# EAGLE board LSU 4.9 OpenAFR MainBoard (EAGLE 9.6.2)
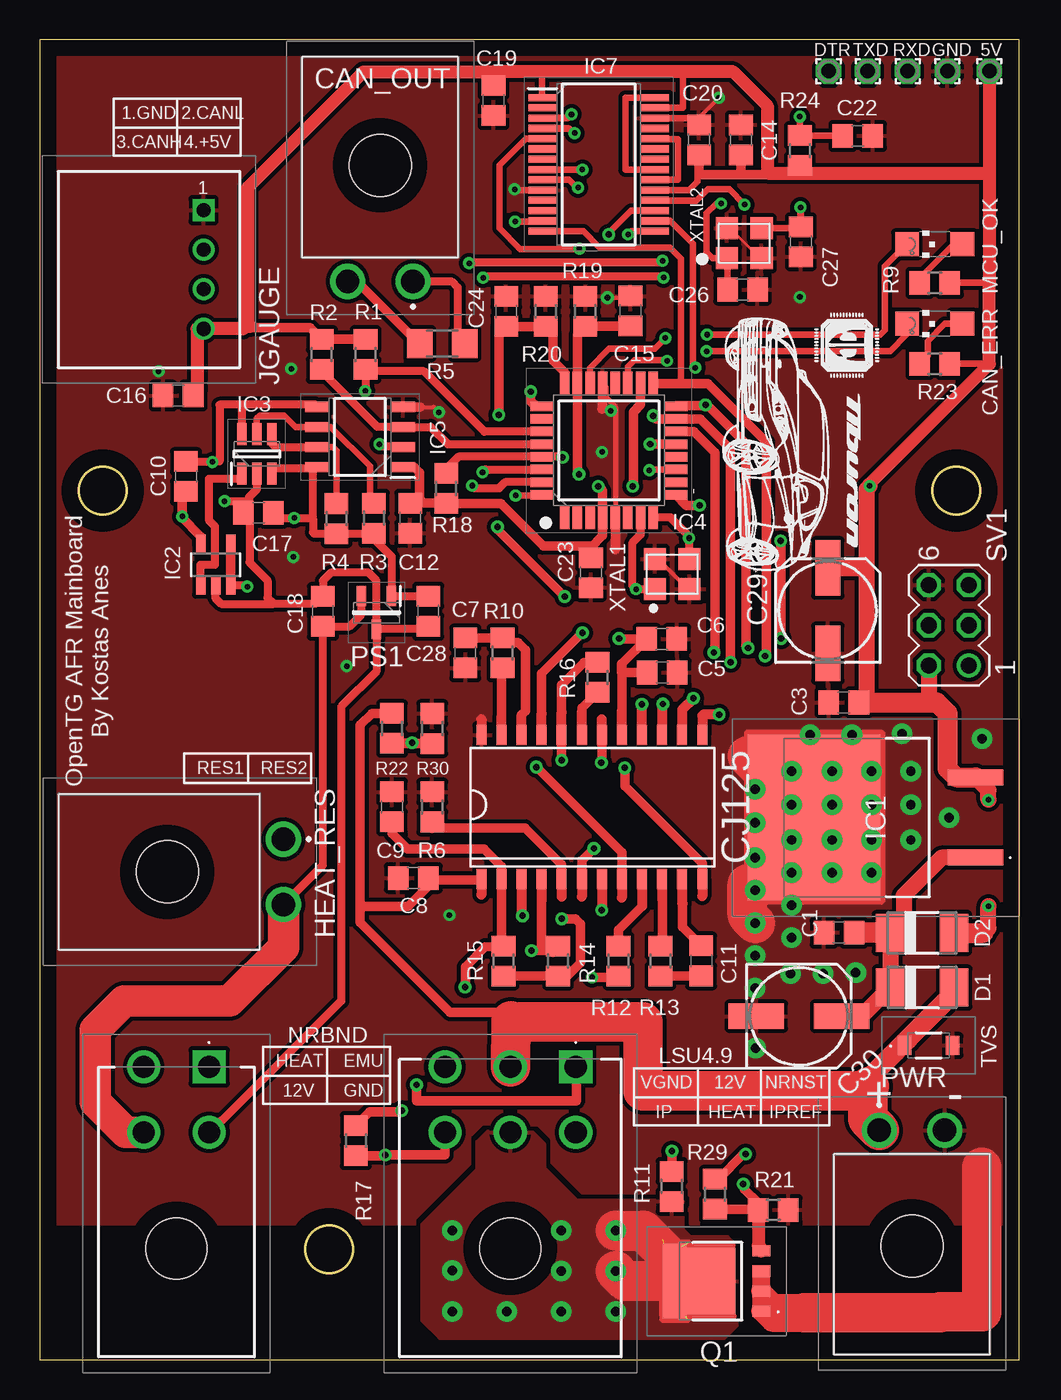
[diagram p0: board, top side]
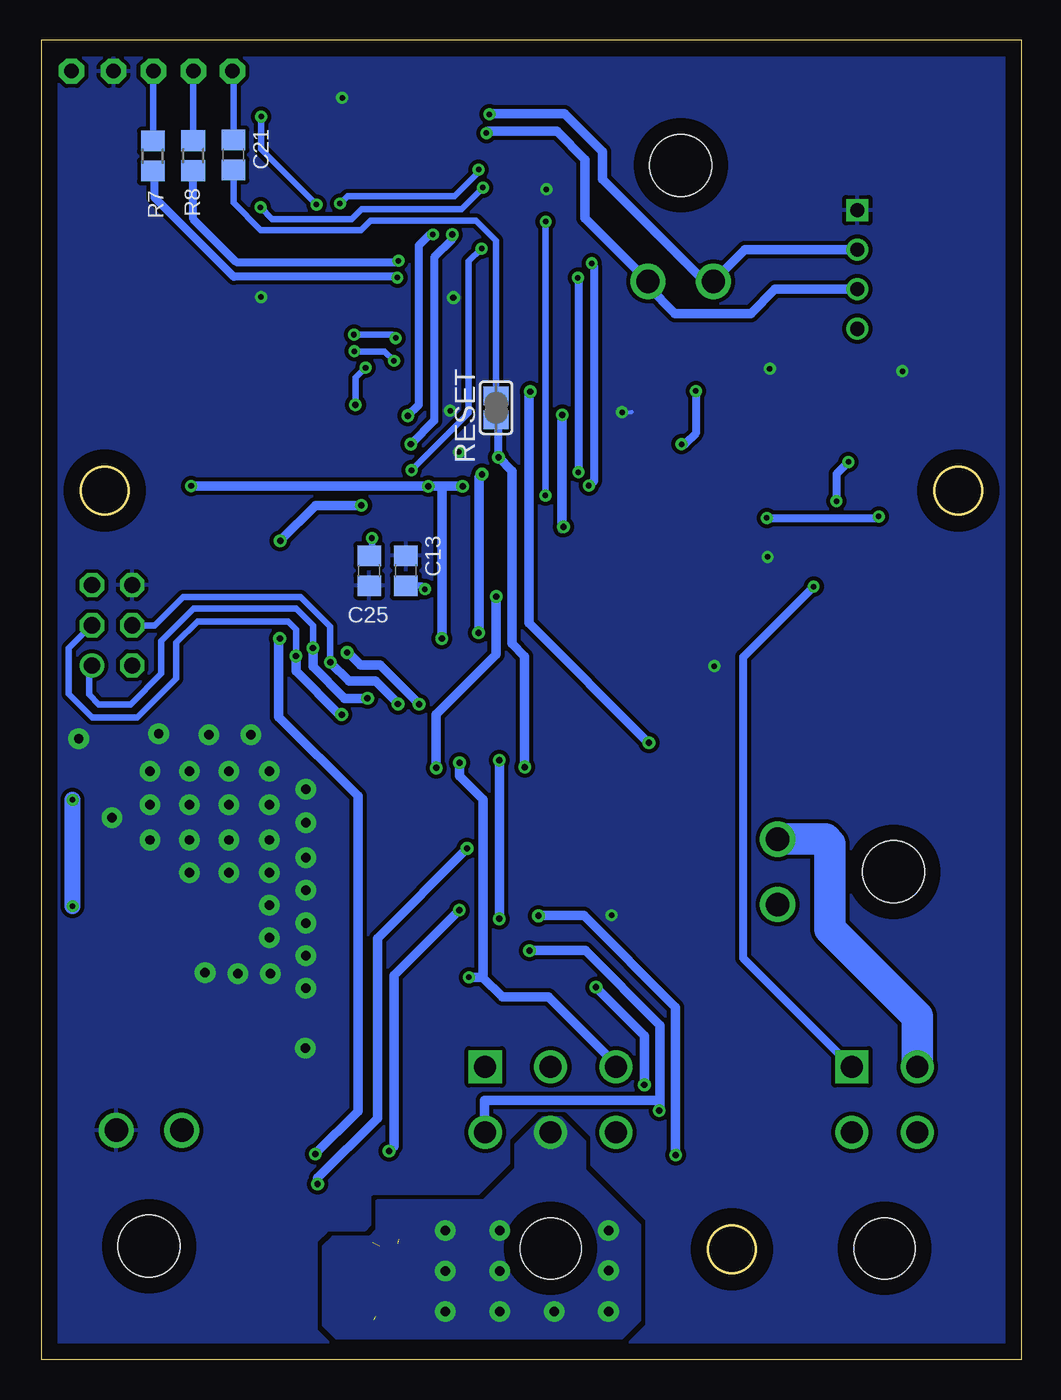
[diagram p1: board, bottom side, seen from below]

Size 62 x 83.54 mm. Coordinates in mm from the lower left corner, seen from the top.
Outline: 0,0 62,0 62,83.54 0,83.54 0,0
Outline: circle at 4,55 radius 1.5
Outline: circle at 58,55 radius 1.5
Outline: circle at 18.33,7 radius 1.5
Copper layers (1*16): Top 0.035mm / dielectric 1.5mm / Bottom 0.035mm
Design rules "default *": minimum track width 6mil, minimum drill 0.35mm, track to track 7mil, track to pad 6mil, pad to pad 6mil, via to via 6mil, smd to smd 6mil, copper to edge 40mil, drill to drill 6mil, minimum pad ring 1mil, minimum via ring 8mil, stop-mask expansion 4mil, vias tented up to drill 0mil, thermal gap 10mil

## Footprints (pad centres in the part's own frame; a part is rotated, then mirrored left to right if it is on the bottom)
1,6/0,9 = drill 0.914 pad 1.6 octagon: 1 0,0
C0805 = smd 1.3 x 1.5: 1 -0.95,0; 2 0.95,0
153CLV-0605 = smd 3.5 x 1.6: + 2.7,0; - -2.7,0
CHIPLED_1206 = smd 1.5 x 1.5: A 0,-1.75; C 0,1.75
17709660 = drill 1.48 pad 2.22: 1 0,0; 2 4.14,0 | hole 3.91: 2.07,-7.34
DO-214AC = smd 1.8 x 2.4: A 2.025,0; C -2.025,0
MC7805CD2TR4G = smd 1.016 x 3.504: 1 -2.54,-6.059; 3 2.54,-6.059 | smd 10.49 x 8.38: 2 0,4.154
SOT23-5 = smd 0.6 x 1.2: 1 -0.95,-1.306; 2 0,-1.306; 3 0.95,-1.306; 4 0.95,1.306; 5 -0.95,1.306
SOT95P270X145-6N = smd 1.4 x 0.6: 1 -1.25,0.95; 2 -1.25,0; 3 -1.25,-0.95; 4 1.25,-0.95; 5 1.25,0; 6 1.25,0.95
QFP80P900X900X120-32N = smd 1.475 x 0.6: 1 -4.238,2.8; 2 -4.238,2; 3 -4.238,1.2; 4 -4.238,0.4; 5 -4.238,-0.4; 6 -4.238,-1.2; 7 -4.238,-2; 8 -4.238,-2.8; 17 4.238,-2.8; 18 4.238,-2; 19 4.238,-1.2; 20 4.238,-0.4; 21 4.238,0.4; 22 4.238,1.2; 23 4.238,2; 24 4.238,2.8 | smd 0.6 x 1.475: 9 -2.8,-4.238; 10 -2,-4.238; 11 -1.2,-4.238; 12 -0.4,-4.238; 13 0.4,-4.238; 14 1.2,-4.238; 15 2,-4.238; 16 2.8,-4.238; 25 2.8,4.238; 26 2,4.238; 27 1.2,4.238; 28 0.4,4.238; 29 -0.4,4.238; 30 -1.2,4.238; 31 -2,4.238; 32 -2.8,4.238
SOIC127P600X175-8N = smd 1.528 x 0.65: 1 -2.711,1.905; 2 -2.711,0.635; 3 -2.711,-0.635; 4 -2.711,-1.905; 5 2.711,-1.905; 6 2.711,-0.635; 7 2.711,0.635; 8 2.711,1.905
SOP65P780X200-28N = smd 1.8 x 0.45: 1 -3.55,4.225; 2 -3.55,3.575; 3 -3.55,2.925; 4 -3.55,2.275; 5 -3.55,1.625; 6 -3.55,0.975; 7 -3.55,0.325; 8 -3.55,-0.325; 9 -3.55,-0.975; 10 -3.55,-1.625; 11 -3.55,-2.275; 12 -3.55,-2.925; 13 -3.55,-3.575; 14 -3.55,-4.225; 15 3.55,-4.225; 16 3.55,-3.575; 17 3.55,-2.925; 18 3.55,-2.275; 19 3.55,-1.625; 20 3.55,-0.975; 21 3.55,-0.325; 22 3.55,0.325; 23 3.55,0.975; 24 3.55,1.625; 25 3.55,2.275; 26 3.55,2.925; 27 3.55,3.575; 28 3.55,4.225
S4BXHALFSN = drill 0.9 pad 1.4 square: 1 0,0 | drill 0.9 pad 1.4: 2 -2.5,0; 3 -5,0; 4 -7.5,0
17709690 = drill 1.4 pad 2.1 square: 1 0,0 | drill 1.4 pad 2.1: 2 -4.14,0; 3 -8.28,0; 4 0,-4.14; 5 -4.14,-4.14; 6 -8.28,-4.14 | hole 3.86: -4.14,-11.48
17709680 = drill 1.4 pad 2.1 square: 1 0,0 | drill 1.4 pad 2.1: 2 -4.14,0; 3 0,-4.14; 4 -4.14,-4.14 | hole 3.86: -2.07,-11.48
SOT95P237X112-3N = smd 1.25 x 0.6: 1 -1.05,0.95; 2 -1.05,-0.95; 3 1.05,0
BUK7Y6R060EX = smd 0.7 x 1.15: 1 -1.905,-2.737; 2 -0.635,-2.737; 3 0.635,-2.737; 4 1.905,-2.737 | smd 4.7 x 1.5: 5 0,2.737 | smd 4.2 x 3.1: 6 0,0.438
R0805 = smd 1.3 x 1.5: 1 -0.95,0; 2 0.95,0
R1206 = smd 1.6 x 1.803: 1 -1.422,0; 2 1.422,0
SJ = smd 1.168 x 1.6: 1 -0.762,0; 2 0.762,0
MA03-2 = drill 1.016: 1 -2.54,-1.27 | drill 1.016 octagon: 2 -2.54,1.27; 3 0,-1.27; 4 0,1.27; 5 2.54,-1.27; 6 2.54,1.27
SMF26VTFTR = smd 1.2 x 0.85: 1 0,1.525; 2 0,-1.525
CJ125-SOIC24 = smd 1.27 x 0.635: P$1 -4.7,7.15; P$2 -4.7,5.88; P$3 -4.7,4.61; P$4 -4.7,3.34; P$5 -4.7,2.07; P$6 -4.7,0.8; P$7 -4.7,-0.47; P$8 -4.7,-1.74; P$9 -4.7,-3.01; P$10 -4.7,-4.28; P$11 -4.7,-5.55; P$12 -4.7,-6.82; P$13 4.4,-6.82; P$14 4.4,-5.55; P$15 4.4,-4.28; P$16 4.4,-3.01; P$17 4.4,-1.74; P$18 4.4,-0.47; P$19 4.4,0.8; P$20 4.4,2.07; P$21 4.4,3.34; P$22 4.4,4.61; P$23 4.4,5.88; P$24 4.4,7.15
E3X160181X04 = smd 1.4 x 1.4: GND1 -1.1,0.9; GND2 1.1,-1; XTAL1 -1.1,-1; XTAL2 1.1,0.9

## Placement (x,y rotation side)
5V1  [1,6/0,9]  60.1,81.54 0 top
C1  100nF  [C0805]  50.58,27.04 180 top
C3  100nF  [C0805]  50.89,41.6 180 top
C5  100nF  [C0805]  39.4,43.49 0 top
C6  100nF  [C0805]  39.37,45.62 0 top
C7  100nF  [C0805]  26.94,44.73 270 top
C8  100nF  [C0805]  23.65,30.49 0 top
C9  2.2nF  [C0805]  22.3,35 90 top
C10  100nF  [C0805]  9.27,55.9 90 top
C11  1nF  [C0805]  41.87,25.25 90 top
C12  100nF  [C0805]  23.46,53.26 90 top
C13  22pF  [C0805]  38.95,49.93 90 bottom
C14  100nF  [C0805]  44.38,77.19 270 top
C15  100nF  [C0805]  37.39,66.37 90 top
C16  100nF  [C0805]  8.77,61.02 0 top
C17  100nF  [C0805]  13.86,53.6 0 top
C18  100nF  [C0805]  17.93,47.36 270 top
C19  100nF  [C0805]  28.73,79.68 90 top
C20  100nF  [C0805]  41.73,77.19 90 top
C21  100nF  [C0805]  49.86,76.24 90 bottom
C22  100nF  [C0805]  51.77,77.44 180 top
C23  100nF  [C0805]  34.89,49.81 270 top
C24  100nF  [C0805]  29.53,66.34 90 top
C25  22pF  [C0805]  41.27,49.94 270 bottom
C26  22pF  [C0805]  44.48,67.71 0 top
C27  22pF  [C0805]  48.18,70.74 270 top
C28  10uF  [C0805]  24.6,47.37 270 top
C29  [153CLV-0605]  49.88,47.41 90 top
C30  [153CLV-0605]  48.05,21.75 0 top
CAN_ERR  [CHIPLED_1206]  56.64,65.56 90 top
CAN_OUT  1-770966-0  [17709660]  23.63,68.24 180 top
D1  S1G  [DO-214AC]  55.85,23.57 0 top
D2  2A Schottky  [DO-214AC]  55.83,27.02 0 top
DTR  [1,6/0,9]  49.93,81.54 0 top
GND1  [1,6/0,9]  57.45,81.54 0 top
HEAT_RES  1-770966-0  [17709660]  15.43,32.95 270 top
IC1  MC7805CD2TR4G  [MC7805CD2TR4G]  53.17,34.32 90 top
IC2  LMV321M5X  [SOT23-5]  11.15,50.32 0 top
IC3  MCP4725A2T-E_CH  [SOT95P270X145-6N]  13.75,57.32 90 top
IC4  ATMEGA328PB-AN  [QFP80P900X900X120-32N]  36.03,57.54 90 top
IC5  ISO6520DR  [SOIC127P600X175-8N]  20.28,58.39 180 top
IC7  MCP25625-E_SS  [SOP65P780X200-28N]  35.38,75.64 0 top
JGAUGE  S4B-XH-A_LF__SN_  [S4BXHALFSN]  10.38,72.74 90 top
LSU4.9  1-770969-0  [17709690]  33.93,18.54 0 top
MCU_OK  [CHIPLED_1206]  56.64,70.59 90 top
NRBND  1-770968-0  [17709680]  10.73,18.54 0 top
PS1  TLV76050DBZR  [SOT95P237X112-3N]  21.32,47.28 270 top
PWR  1-770966-0  [17709660]  53.13,14.54 0 top
Q1  BUK7Y6R0-60EX  [BUK7Y6R060EX]  42.93,4.99 90 top
R1  10k  [R0805]  20.63,63.61 270 top
R2  10k  [R0805]  17.86,63.61 270 top
R3  10k  [R0805]  21.16,53.25 90 top
R4  10k  [R0805]  18.79,53.23 90 top
R5  120R  [R1206]  25.48,64.3 180 top
R6  10k  [R0805]  24.85,34.99 270 top
R7  150R  [R0805]  54.96,76.17 270 bottom
R8  150R  [R0805]  52.41,76.19 270 bottom
R9  1k  [R0805]  56.64,68.14 0 top
R10  100k  [R0805]  29.3,44.73 270 top
R11  6k8  [R0805]  40,10.98 90 top
R12  301R  [R0805]  36.63,25.24 90 top
R13  31K6  [R0805]  39.29,25.24 90 top
R14  470k  [R0805]  32.81,25.24 90 top
R15  100k  [R0805]  29.36,25.24 270 top
R16  4k7  [R0805]  35.3,43.19 270 top
R17  61R9  [R0805]  20.02,13.88 270 top
R18  10k  [R0805]  25.73,55.14 90 top
R19  100k  [R0805]  34.53,66.34 90 top
R20  100k  [R0805]  32.03,66.34 90 top
R21  10k  [R0805]  46.43,9.49 0 top
R22  100k  [R0805]  22.3,39.96 270 top
R23  1k  [R0805]  56.64,63.02 0 top
R24  10k  [R0805]  48.11,76.51 270 top
R29  300R  [R0805]  42.73,10.49 90 top
R30  10k  [R0805]  24.85,39.95 90 top
RESET  [SJ]  33.24,60.24 270 bottom
RXD  [1,6/0,9]  54.93,81.54 0 top
SV1  [MA03-2]  57.54,46.48 90 top
TVS  SMF26VTFTR  [SMF26VTFTR]  56.25,19.9 90 top
TXD  [1,6/0,9]  52.4,81.54 0 top
U$1  CJ125-SOIC24  [CJ125-SOIC24]  35.11,35.13 90 top
U$4  E3X160181X04  [E3X160181X04]  40.03,49.77 0 top
U$5  E3X160181X04  [E3X160181X04]  44.59,70.7 0 top

## Library data of the parts
5V1 DTR GND1 RXD TXD = wirepad
C1 C3 C5-C30 = rcl; SPICEPREFIX: C
CAN_ERR MCU_OK = led
CAN_OUT HEAT_RES PWR = 1-770966-0; DESCRIPTION: TE Connectivity MATE-N-LOK Series, 4.14mm Pitch 2 Way Right Angle Heavy Duty Power Connector, Solder Termination, 9.5A; HEIGHT: 7.77mm; MANUFACTURER_NAME: TE Connectivity; MANUFACTURER_PART_NUMBER: 1-770966-0; MOUSER_PART_NUMBER: 571-1-770966-0; MOUSER_PRICE-STOCK: https://www.mouser.co.uk/ProductDetail/TE-Connectivity-AMP/1-770966-0?qs=qXO2HHLAcoJiZj6lD7oupQ%3D%3D
D1 D2 = diode
IC1 = MC7805CD2TR4G; DESCRIPTION: Linear Voltage Regulator IC Positive Fixed 1 Output 1A D2PAK-3; HEIGHT: 4.826mm; MANUFACTURER_NAME: onsemi; MANUFACTURER_PART_NUMBER: MC7805CD2TR4G; MOUSER_PART_NUMBER: 863-MC7805CD2TR4G; MOUSER_PRICE-STOCK: https://www.mouser.co.uk/ProductDetail/onsemi/MC7805CD2TR4G?qs=%252B9%2Fcbd0IE0TA2t8QN7DaSw%3D%3D
IC2 = linear
IC3 = MCP4725A2T-E_CH; DESCRIPTION: Microchip MCP4725A2T-E/CH, 12 bit Serial DAC, 3.4Msps, 6-Pin SOT-23; HEIGHT: 1.45mm; MANUFACTURER_NAME: Microchip; MANUFACTURER_PART_NUMBER: MCP4725A2T-E/CH; MOUSER_PART_NUMBER: 579-MCP4725A2T-E/CH; MOUSER_PRICE-STOCK: https://www.mouser.co.uk/ProductDetail/Microchip-Technology/MCP4725A2T-E-CH?qs=hH%252BOa0VZEiABOw9BMlFjfA%3D%3D
IC4 = ATMEGA328PB-AN; DESCRIPTION: MCU 8-bit ATmega AVR RISC 32KB Flash 2.5V/3.3V/5V 32-Pin TQFP Tray; HEIGHT: 1.2mm; MANUFACTURER_NAME: Microchip; MANUFACTURER_PART_NUMBER: ATMEGA328PB-AN; MOUSER_PART_NUMBER: 556-ATMEGA328PB-AN; MOUSER_PRICE-STOCK: https://www.mouser.co.uk/ProductDetail/Microchip-Technology/ATMEGA328PB-AN?qs=jy4bLUHv09gDoS2J01KCIw%3D%3D
IC5 = ISO6520DR; DESCRIPTION: Digital Isolators Functional isolation dual-channel 2/0 digital isolator; HEIGHT: 1.75mm; MANUFACTURER_NAME: Texas Instruments; MANUFACTURER_PART_NUMBER: ISO6520DR; MOUSER_PART_NUMBER: 595-ISO6520DR; MOUSER_PRICE-STOCK: https://www.mouser.co.uk/ProductDetail/Texas-Instruments/ISO6520DR?qs=i8QVZAFTkqS9DQbJZwhOyw%3D%3D
IC7 = MCP25625-E_SS; DESCRIPTION: CAN Controller with Transceiver SSOP28 Microchip MCP25625-E/SS, CAN Controller 1MBps CAN 2.0, 28-Pin SSOP; HEIGHT: 2mm; MANUFACTURER_NAME: Microchip; MANUFACTURER_PART_NUMBER: MCP25625-E/SS; MOUSER_PART_NUMBER: 579-MCP25625-E/SS; MOUSER_PRICE-STOCK: https://www.mouser.co.uk/ProductDetail/Microchip-Technology/MCP25625-E-SS?qs=YlpJWyuQ3PO6FRVW%2Ffac7A%3D%3D
JGAUGE = S4B-XH-A_LF__SN_; DESCRIPTION: XH-2.5mm Header side entry 4 way JST XH Series, Series Number S4B, 2.5mm Pitch 4 Way 1 Row Right Angle PCB Header, Solder Termination, 3A; HEIGHT: 7mm; MANUFACTURER_NAME: JST (JAPAN SOLDERLESS TERMINALS); MANUFACTURER_PART_NUMBER: S4B-XH-A(LF)(SN); MOUSER_PART_NUMBER: N/A; MOUSER_PRICE-STOCK: https://www.mouser.co.uk/ProductDetail/JST-Commercial/S4B-XH-ALFSN?qs=QpmGXVUTftF7eeJ4yg3VYQ%3D%3D
LSU4.9 = 1-770969-0; DESCRIPTION: PCB Mount Header, Right Angle, Wire-to-Board, 6 Position, 4.14 mm [.162 in] Centerline, Fully Shrouded, Tin, Mini-Universal MATE-N-LOK; HEIGHT: 11.99mm; MANUFACTURER_NAME: TE Connectivity; MANUFACTURER_PART_NUMBER: 1-770969-0; MOUSER_PART_NUMBER: 571-1-770969-0; MOUSER_PRICE-STOCK: https://www.mouser.co.uk/ProductDetail/TE-Connectivity-AMP/1-770969-0?qs=qXO2HHLAcoJbD0GMLxxebg%3D%3D
NRBND = 1-770968-0; DESCRIPTION: PCB Mount Header, Right Angle, Wire-to-Board, 4 Position, 4.14 mm [.162 in] Centerline, Fully Shrouded, Tin, Mini-Universal MATE-N-LOK; HEIGHT: 11.86mm; MANUFACTURER_NAME: TE Connectivity; MANUFACTURER_PART_NUMBER: 1-770968-0; MOUSER_PART_NUMBER: 571-1-770968-0; MOUSER_PRICE-STOCK: https://www.mouser.co.uk/ProductDetail/TE-Connectivity-AMP/1-770968-0?qs=qXO2HHLAcoL4Dw11VWHBrA%3D%3D
PS1 = TLV76050DBZR; DESCRIPTION: 100-mA, 30-V wide-VIN, fixed-output linear voltage regulator; HEIGHT: 1.12mm; MANUFACTURER_NAME: Texas Instruments; MANUFACTURER_PART_NUMBER: TLV76050DBZR; MOUSER_PART_NUMBER: 595-TLV76050DBZR; MOUSER_PRICE-STOCK: https://www.mouser.co.uk/ProductDetail/Texas-Instruments/TLV76050DBZR?qs=HXFqYaX1Q2wum5FdXU6CLA%3D%3D
Q1 = BUK7Y6R0-60EX; DESCRIPTION: MOSFET BUK7Y6R0-60E/SOT669/LFPAK; HEIGHT: 1.2mm; MANUFACTURER_NAME: Nexperia; MANUFACTURER_PART_NUMBER: BUK7Y6R0-60EX; MOUSER_PART_NUMBER: 771-BUK7Y6R0-60EX; MOUSER_PRICE-STOCK: https://www.mouser.co.uk/ProductDetail/Nexperia/BUK7Y6R0-60EX?qs=cbprxTG2Yq9UL%2F2WHaKVPw%3D%3D
R1-R24 R29 R30 = rcl; SPICEPREFIX: R
RESET = jumper
SV1 = con-lstb; OC_FARNELL: unknown; OC_NEWARK: unknown
TVS = SMF26VTFTR; DESCRIPTION: Transient Voltage Suppressor (AEC-Q101 Qualified); HEIGHT: 0.9mm; MANUFACTURER_NAME: ROHM Semiconductor; MANUFACTURER_PART_NUMBER: SMF26VTFTR; MOUSER_PART_NUMBER: 755-SMF26VTFTR; MOUSER_PRICE-STOCK: https://www.mouser.co.uk/ProductDetail/ROHM-Semiconductor/SMF26VTFTR?qs=HXFqYaX1Q2zSWViY1YLSPg%3D%3D
U$1 = CJ125-SOIC24
U$4 U$5 = E3X160181X04

## Nets
5V_ISO: C10.1 C17.2 C28.1 IC2.5 IC3.3 IC5.8 PS1.1 R3.1 R4.1
12VNRBND: C18.2 HEAT_RES.2 NRBND.4 PS1.2
+5V: 5V1.1 C3.1 C5.1 C6.1 C12.2 C14.2 C16.2 C19.2 C20.1 C23.1 C29.+ D2.A IC1.3 IC4.4 IC4.18 IC5.1 IC7.1 IC7.19 IC7.27 JGAUGE.4 R1.1 R2.1 R9.2 R18.1 R23.2 R24.2 SV1.2 U$1.P$17
+12V: C8.2 D1.A LSU4.9.2 PWR.1 R22.1 TVS.1 U$1.P$1
CAN_H: CAN_OUT.1 IC7.4 JGAUGE.3 R5.1
CAN_INT: IC4.32 IC7.13
CAN_L: CAN_OUT.2 IC7.3 JGAUGE.2 R5.2
CAN_STBY: IC4.11 IC7.5
DTR: C21.2 DTR.1
ERROR_LED: CAN_ERR.C IC4.19
GND: C1.2 C3.2 C5.2 C6.2 C7.2 C8.1 C9.2 C12.1 C13.2 C14.1 C15.2 C16.1 C19.1 C20.2 C22.1 C23.2 C24.2 C25.2 C26.2 C27.2 C29.- C30.- GND1.1 IC1.2 IC4.5 IC4.21 IC5.4 IC7.10 IC7.26 JGAUGE.1 PWR.2 Q1.1 Q1.2 Q1.3 R6.1 R19.2 R20.2 R21.2 R30.2 SV1.6 TVS.2 U$1.P$24 U$4.GND1 U$4.GND2 U$5.GND1 U$5.GND2
HEAT_GATE: Q1.4 R21.1 R29.1 U$1.P$6
LSU_HEAT: LSU4.9.5 Q1.5 Q1.6 R11.1
LSU_IP: LSU4.9.6 R17.2 U$1.P$3
LSU_IPREF: LSU4.9.4 R14.2 R17.1 U$1.P$4
LSU_VGND: LSU4.9.3 R12.1 U$1.P$18
LSU_VNERNST: C9.1 LSU4.9.1 R15.1 U$1.P$2
N$1: C27.1 IC7.9 U$5.XTAL2
N$2: R10.2 U$1.P$23
N$3: IC2.1 IC3.1
N$4: C21.1 RESET.1
N$5: C26.1 IC7.8 U$5.XTAL1
N$6: C1.1 C30.+ D1.C D2.C IC1.1
N$7: R6.2 U$1.P$5
N$8: IC4.31 R8.2
N$9: IC4.30 R7.2
N$10: MCU_OK.A R9.1
N$11: C7.1 R10.1 U$1.P$22
N$12: CAN_ERR.A R23.1
N$13: C22.2 IC7.18 R24.1
N$14: R12.2 U$1.P$9
N$15: R11.2 U$1.P$7
N$16: R13.2 U$1.P$10
N$17: C11.1 R13.1
N$18: C11.2 U$1.P$11
N$20: R16.2 U$1.P$19
N$23: IC4.25 R22.2 R30.1
N$24: C25.1 IC4.8 U$4.XTAL2
N$25: C13.1 IC4.7 U$4.XTAL1
N$32: IC4.9 R29.2
NRBND_EMU: IC2.3 IC2.4 NRBND.1
NRBND_GND: C10.2 C17.1 C18.1 C28.2 IC2.2 IC3.2 IC3.6 IC5.5 NRBND.3 PS1.3
NRBND_HEAT: HEAT_RES.1 NRBND.2
POWER_ON: IC4.22 MCU_OK.C
RESET: IC4.29 R18.2 RESET.2 U$1.P$8
RXCAN: IC7.21 IC7.28
RXD: R8.1 TXD.1
SCL: IC4.28 IC5.3 R2.2
SCL_ISO: IC3.5 IC5.6 R3.2
SDA: IC4.27 IC5.2 R1.2
SDA_ISO: IC3.4 IC5.7 R4.2
SPI_CLK: IC4.17 IC7.14 SV1.3 U$1.P$13
SPI_CS1: IC4.14 U$1.P$16
SPI_CS2: IC4.13 IC7.17
SPI_MISO: IC4.16 IC7.16 SV1.1 U$1.P$14
SPI_MOSI: IC4.15 IC7.15 SV1.4 U$1.P$15
TXCAN: IC7.20 IC7.24
TXD: R7.1 RXD.1
UA: C15.1 IC4.23 R19.1 U$1.P$21
UR: C24.1 IC4.24 R20.1 U$1.P$12
USUP: R14.1 R15.2 R16.1 U$1.P$20

## Tracks (layer width: path | path; a pad name or v marks a point on that pad's centre or on a via)
5V_ISO  (via drill 0.35)
  Top 0.508: 17.29,56.41 17.31,56.41 17.31,53.22 | 17.29,56.41 14.78,56.41 14.7,56.33 IC3.3 | 17.29,56.41 17.29,56.44 17.29,56.48 | 9.03,54.95 C10.1 | C17.2 15.14,53.27 v16.12,53.27 17.26,53.27 17.31,53.22 | R3.1 21.08,52.22 | R4.1 18.25,52.28 | 17.31,53.22 17.31,52.36 17.39,52.28 R4.1 | R4.1 21.14,52.28 R3.1 | R3.1 21.16,51.93 22.28,50.81 PS1.1 C28.1
  Top 0.6: 17.29,56.48 IC5.8 | 17.4,56.44 17.29,56.44
  Top 0.61: IC2.5 10.2,52.1 8.98,53.32 v9.03,53.37 9.03,54.95
  Bottom 0.406: 9.03,53.26 v9.03,53.37 | v16.12,53.26 v16.12,53.27
  Bottom 0.508: v16.12,53.26 9.03,53.26
12VNRBND
  Top 0.508: PS1.2 20.37,47.17 19.61,46.41 C18.2 17.93,31.31 HEAT_RES.2
  Top 0.6: PS1.2
  Top 2: HEAT_RES.2 15.43,26.1 12.04,22.71 5.36,22.71 3.52,20.87 3.52,16.32 5.44,14.4 NRBND.4
+5V  (via drill 0.35, 0.4 pad 0.6, 0.4 pad 0.75)
  Top 0.2: JGAUGE.4 10.54,65.4 13.34,65.4
  Top 0.406: R2.1 19.21,64.57 19.46,64.57 | C20.1 41.63,76.24 41.63,74.55 41.1,74.02 IC7.19 | 31.86,79.86 IC7.1 31.78,79.92 31.78,81.49 | R9.2 57.62,68.17 60.09,68.17 | R23.2 60.09,63.03 60.12,63.03 | IC7.27 40.7,79.22 40.7,81.45 40.66,81.49 | R24.2 48.11,75.12 48.08,75.09
  Top 0.508: C12.2 23.78,54.21 24.06,54.49 | 56.27,41.66 52.33,41.66
  Top 0.6: 36.85,41.05 36.85,44.05 C6.1 | C5.1 36.82,43.49 36.82,44.03 C6.1 | C6.1 36.69,45.62 v36.67,45.64 | IC5.1 22.96,56.45 | R2.1 17.9,64.6 20.59,64.6 R1.1 | R1.1 | JGAUGE.4 10.36,65.22 | 9.97,61.27 C16.2 | 44.38,74.99 41.73,74.99 C20.1 | C14.2 44.38,74.99 | 60.09,74.99 60.06,74.99 | C23.1 34.86,50.76 34.86,51.38 34.86,51.5 | 29.14,81.04 C19.2 | 46.04,75.09 46.04,74.99 44.38,74.99
  Top 0.61: 34.86,51.5 31.88,51.5 29.19,54.19 R18.1 25.7,54.22 24.34,54.22 24.06,54.49 24.06,56.13 23.71,56.48 IC5.1 | IC4.18 38.03,60.43 37.58,59.97 37.58,55.33 v37.53,55.28 | v35.36,55.28 35.63,55.01 IC4.4 35.63,52.15 34.86,51.38 | 13.34,65.4 13.44,65.3 17.12,65.3 R2.1
  Top 0.63: U$1.P$17 36.85,41.05
  Top 0.813: 10.36,65.22 9.97,65.22 9.97,61.27 | v52.53,55.3 52.53,55.45 60.12,63.03 | 60.09,63.03 60.09,68.17 60.09,74.99 60.09,75.09 | 60.09,75.09 48.08,75.09 46.04,75.09 46.04,79.34 43.89,81.49 40.66,81.49 31.78,81.49 28.67,81.49 | 60.09,75.09 5V1.1 | JGAUGE.4 12.86,65.24 13.18,65.56 13.18,74.17 20.5,81.49 28.67,81.49 | 13.24,65.4 13.34,65.4 | C19.2 28.73,81.43 28.67,81.49
  Top 1: C3.1 52.33,41.6 52.33,41.66 52.33,50.2 52.33,55.09 v52.53,55.3
  Top 1.016: 59.73,27.02 60.04,27.33 v60.04,28.71 | v60.04,35.44 60.04,36.05 IC1.3 | C29.+ 52.23,50.11 52.33,50.2 | SV1.2 56.27,41.66
  Top 1.27: C3.1 56.76,41.6 57.44,40.92 57.44,37.42 58,36.86 IC1.3 | D2.A 59.73,27.02
  Bottom 0.6: 36.67,55.28 v37.53,55.28 | 36.67,55.28 v35.36,55.28 | 36.67,55.28 v36.67,45.64 36.67,47.13 | 52.53,55.28 v52.53,55.3
  Bottom 0.61: v37.53,55.28 52.53,55.28
  Bottom 1.016: v60.04,28.71 v60.04,35.44
+12V
  Top 0.152: 55.04,20.16 54.92,20.28 | 54.51,19.52 54.16,19.52 54.53,19.9 TVS.1 52.51,17.68 52.51,17.3
  Top 0.6: C8.2 24.6,30.39 25,30.39 | U$1.P$1 27.91,30.38 24.99,30.38 | 22.3,40.93 R22.1 | 20.29,40.17 20.29,28.7 | 29.83,21.45 29.83,22 29.49,22
  Top 0.61: 25,30.39 24.99,30.38 23.31,28.7 20.29,28.7 20.29,27.69 25.98,22 29.49,22 | R22.1 21.03,40.91 20.29,40.17
  Top 0.63: U$1.P$1 27.96,29.43
  Top 1.27: D1.A 57.88,23.24 54.92,20.28 54.16,19.52 51.67,17.04
  Top 2.5: LSU4.9.2 29.83,21.39 | 29.83,21.39 29.83,21.45 | 51.67,17.04 38.19,17.04 38.19,21.39 29.83,21.39 | 52.51,17.3 52.41,17.2 52.41,15.26 PWR.1
CAN_H  (via drill 0.35)
  Top 0.45: v33.85,77.62 33.76,77.62 33.47,77.92 IC7.4
  Top 0.508: CAN_OUT.1 26.06,68.24 26.45,67.85 26.45,64.75 R5.1
  Bottom 0.61: v33.85,77.62 33.74,77.72 29.4,77.72 27.63,75.95 27.63,72.24 CAN_OUT.1 23.63,67.93 21.91,66.21 17.12,66.21 15.59,67.74 JGAUGE.3
CAN_INT  (via drill 0.35)
  Top 0.406: 31.76,54.7 IC4.32 31.74,54.69 v30.12,54.69 | v30.1,72.03 31.83,72.03 IC7.13
  Bottom 0.406: v30.12,54.69 v30.11,54.7 v30.11,72.03 v30.1,72.03
CAN_L  (via drill 0.35)
  Top 0.45: v33.66,78.8 33.43,78.57 IC7.3
  Top 0.61: CAN_OUT.2 19.79,68.54 23.63,64.69 24.06,64.69 R5.2
  Bottom 0.61: v33.66,78.8 33.62,78.84 28.9,78.84 26.5,76.44 26.5,74.69 20.05,68.24 CAN_OUT.2 17.49,70.24 JGAUGE.2
CAN_STBY  (via drill 0.35)
  Top 0.406: IC7.5 30.79,77.27 29.1,75.58 29.1,71.59 30.4,70.29 34.13,70.29 v34.16,70.32 | v38.59,56.29 38.63,56.33 IC4.11
  Bottom 0.406: v34.16,70.32 34.97,69.51 34.97,59.91 v38.59,56.29
DTR
  Bottom 0.406: DTR.1 49.86,81.47 C21.2
ERROR_LED  (via drill 0.35)
  Top 0.406: CAN_ERR.C 54.89,64.89 53.82,63.82 v42.21,63.82 | v39.71,63.21 39.67,63.25 37.65,63.25 37.23,62.83 IC4.19
  Bottom 0.406: v39.71,63.21 40.29,63.79 42.18,63.79 v42.21,63.82
GND  (via drill 0.35, 0.35 pad 0.75, 0.4 pad 0.6, 0.6 pad 1.3)
  Top 0.2: U$5.GND1 43.67,71.6 45.57,69.7 45.81,69.7
  Top 0.254: 39.13,50.67 41.03,48.77 | 24.07,60.3 24.93,60.3 v25.27,59.96 | C20.2 41.73,78.6 v42.98,79.85 | IC4.21 35.63,60.57 v36.15,60.05 | v35.94,67.21 37.36,67.21 37.39,67.24
  Top 0.305: 41.03,48.77 U$4.GND2 | 43.66,71.64 43.53,71.64 U$5.GND1 | 45.6,69.7 45.81,69.7 | 39.13,50.67 U$4.GND1 | IC4.21 35.83,61.58 35.83,60.91 36.43,60.31 IC4.5 | IC7.10
  Top 0.406: C19.1 28.87,78.59 | 38.94,78.58 IC7.26 41.3,78.56 41.75,78.12 | 41.73,78.58 C20.2 | U$5.GND2 45.81,69.7 45.85,69.7 | 45.69,67.97 C26.2 | 48.09,69.7 C27.2 | Q1.3 45.28,5.24 45.28,3.47 Q1.1 | Q1.3 46.03,5.26 46.03,5.1 | 46.03,5.1 46.03,4.75 | 45.89,4.96 45.67,4.74 Q1.2 45.67,5.18 | 45.89,4.96 46.03,5.1 | Q1.3 45.67,5.18 | 45.67,5.18 45.89,4.96 | 44.83,29.02 53.26,29.02 53.32,29.08 53.32,39.6 53.26,39.66 44.8,39.66 44.79,39.65 44.79,38.21 44.79,30.11 44.79,29.04 | 44.79,29.04 44.72,28.97 | IC1.2 49.02,33.27 44.79,29.04 | IC7.10 30.11,74.02 v30.06,74.06
  Top 0.6: C7.2 26.98,43.74 | 24.83,35.95 R6.1 | 8.02,61.02 C16.1 7.53,60.73 | R30.2 25.1,40.65 | C5.2 40.45,43.39 | v35.94,67.21 35.94,67.24 | 37.39,67.24 C15.2 | 34.53,67.24 R19.2 | 41.75,78.12 C20.2
  Top 0.61: IC4.21 35.63,60.19 35.59,60.15 | IC4.5 36.43,51.26 | IC5.4 24.07,60.3
  Top 0.63: 27.96,40.55 U$1.P$24
  Top 0.813: R21.2 47.18,9.29 | 40.32,46 C6.2
  Top 1.27: Q1.1 46.33,2.42 51.1,2.42 50.54,2.98 48.39,2.98 47.04,2.98 Q1.2 46.46,3.56 48.65,3.56
  Top 2.5: 48.39,2.98 56.95,2.98 57.01,3.04 59.63,3.04 59.63,12.2 59.61,12.2
  Top 2.54: v45.27,27.65 44.79,28.13 44.79,30.11 | IC1.2 48.68,34.32 44.79,38.21
  Bottom 0.254: v25.27,59.96 24.68,59.96 24.65,59.99
  Bottom 0.813: 57.51,81.48 GND1.1
  other vias: 47.59,28.78 47.59,37.24 47.59,35.12 50.15,35.12 52.64,35.12 52.64,32.9 50.15,32.9 47.59,32.9 47.59,30.84 47.59,26.72 50.15,30.84 52.64,30.84 50.15,37.24 52.64,37.24 55.13,37.24 55.13,35.12 55.13,32.9 47.52,24.43 7.53,62.55 59.65,39.29 51.65,24.51 49.59,24.45 57.54,34.3 45.27,36.11 45.27,33.99 45.27,31.77 45.27,29.71 45.27,25.59 45.27,23.53 45.3,19.73 16.06,50.8 35.59,57.44 19.44,43.9 25.94,28.14 15.93,62.71 48.11,67.25 48.75,39.56 51.4,39.56 54.59,39.61
  pour Top (isolate 0.254, rank 2): 1.04,8.64 62.72,8.64 62.72,82.76 1.04,82.76
  pour Bottom (isolate 0.254, rank 2): 0.99,82.75 0.99,-0.84 63.41,-0.84 63.41,82.75
HEAT_GATE  (via drill 0.4 pad 0.6)
  Top 0.6: v35.08,32.36 34.32,31.6 U$1.P$6 | R29.1 45.43,9.54 R21.1
  Top 0.61: v44.53,11.13 44.61,11.05 44.61,10.8 45.48,9.93 R21.1
  Top 0.63: U$1.P$6 34.31,29.3
  Top 0.813: R21.1 45.48,7.25 45.67,7.07 Q1.4
  Bottom 0.6: v44.53,11.13 44.53,11.51 40.75,15.29
  Bottom 0.61: v35.08,32.36 40.75,26.69 40.75,15.29
LSU_HEAT  (via drill 0.6 pad 1.3)  (3 unrouted)
  Top 0.2: 40.25,5.73 39.4,5.73
  Top 0.406: 39.4,7.62 39.4,5.73 39.4,2.59 39.46,2.53 40.99,2.53 | 39.47,7.37 39.52,7.42 41.07,7.42 | 40.62,7.18 40.68,7.24 43.83,7.24 | 40.87,2.78 43.92,2.78 | Q1.6 41.75,5.73 40.66,5.73 40.25,5.73
  Top 0.6: 40,4.99 Q1.6
  Top 2.54: v36.45,8.18 38.21,8.18 40.66,5.73 | Q1.6 37.08,4.99 v36.45,5.62
  other vias: 26.13,8.18 33.01,8.18 33.01,5.62 26.13,5.66 26.13,3.06 29.57,3.06 33.01,3.06 36.45,3.06
  pour Top: 29.18,15.34 27.65,13.81 27.65,12.06 24.18,8.59 24.18,2.49 25.3,1.37 43.36,1.37 44.15,2.16 44.15,7.21 43.56,7.8 41.23,7.8 40.75,8.28 40.75,10.03 40.69,10.09 34.04,10.09 31.98,12.15 31.98,13.67 30.31,15.34
  pour Bottom (no thermals): 29.15,15.35 27.66,13.86 27.66,13.68 27.65,13.67 27.65,12.06 24.17,8.58 24.17,2.49 25.29,1.37 43.35,1.37 44.15,2.17 44.15,7.22 43.57,7.8 41.22,7.8 40.76,8.26 40.76,10.09 34.03,10.09 31.97,12.15 31.97,13.69 30.31,15.35
LSU_IP  (via drill 0.4 pad 0.6)
  Top 0.6: 30.5,28.1 v30.56,28.1 | 20.02,12.84 R17.2 21.88,12.93 v21.88,12.97 25.65,12.97 LSU4.9.6
  Top 0.63: U$1.P$3 30.5,28.1
  Bottom 0.61: v30.56,28.1 v30.55,28.11 27.67,28.11 21.88,22.32 v21.88,12.97
LSU_IPREF  (via drill 0.4 pad 0.6)
  Top 0.508: R14.2 32.49,25.77
  Top 0.6: v22.92,15.78 22.84,15.7 20.89,15.7 R17.1 | 31.06,25.97 v31.13,25.9 31.77,25.9 | 32.49,25.77 32.49,25.9 31.77,25.9 | 31.77,29.1 31.77,25.9
  Top 0.63: U$1.P$4 31.77,29.1
  Bottom 0.6: LSU4.9.4 33.98,16.42 22.92,16.42 v22.92,15.78
  Bottom 0.61: v31.13,25.9 27.58,25.9 22.86,21.18 22.86,15.84 v22.92,15.78
LSU_VGND  (via drill 0.35, 0.4 pad 0.6)
  Top 0.6: U$1.P$18 35.58,37.81 v35.55,37.78 | v34.96,24.21 36.17,24.21 36.25,24.29 R12.1
  Top 0.63: U$1.P$18 35.58,40.54
  Bottom 0.6: LSU4.9.3
  Bottom 0.61: LSU4.9.3 25.65,18.7 29.92,22.97 32.85,22.97 34.09,24.21 v34.96,24.21 34.07,24.21 34.07,35.46 35.55,36.94 v35.55,37.78
LSU_VNERNST  (via drill 0.4 pad 0.6)
  Top 0.6: LSU4.9.1 33.97,16.41 23.87,16.41 v23.87,17.4 v23.86,17.41 | U$1.P$2 29.23,26.32 R15.1 28.19,26.13 26.94,24.88 26.94,23.6 v26.92,23.58
  Top 0.61: U$1.P$2 29.23,31.23 28.13,32.34 23.27,32.34 22.3,33.31 C9.1
  Bottom 0.6: v26.92,23.58 23.84,20.5 23.84,17.43 v23.86,17.41
N$1  (via drill 0.35)
  Top 0.406: v34.08,74.17 34,74.17 33.5,74.67 IC7.9 | U$5.XTAL2 47.79,71.6 48.15,71.96 v48.15,72.92 48.18,72.89 C27.1
  Bottom 0.406: v48.15,72.92 47.41,72.18 42.38,72.18 41.74,72.81 35.44,72.81 v34.08,74.17
N$2
  Top 0.6: R10.2 29.23,43.71 29.23,40.65
  Top 0.63: U$1.P$23 29.23,40.65
N$3
  Top 0.508: IC2.1 10.18,49.01 10.18,50.32 11.11,50.32 11.11,52.74 10.71,53.14 10.71,55.76 12.81,55.76 IC3.1
N$4
  Bottom 0.406: RESET.1 33.24,70.8 34.51,72.07 41.18,72.07 41.77,71.48 48.13,71.48 49.86,73.21 C21.1
N$5  (via drill 0.35)
  Top 0.406: v34.35,75.31 v34.34,75.31 IC7.8 | v43.12,73.17 42.82,73.17 42.21,72.56 42.21,70.08 42.59,69.7 U$5.XTAL1 43.53,69.66 C26.1
  Bottom 0.406: v43.12,73.17 42.65,73.64 35.86,73.64 34.35,75.15 v34.35,75.31
N$6
  Top 1: D2.C 53.83,27 D1.C
  Top 1.016: IC1.1 57.08,31.78 54.68,29.38 54.68,27.86 53.83,27 | C30.+ 52.01,21.75 D1.C
  Top 1.27: D1.C 53.83,23.18
  Top 1.3: D2.C 53.8,27.04 C1.1
N$7
  Top 0.6: 24.84,33.64 R6.2
  Top 0.61: U$1.P$5 33.04,31.35 30.73,33.66 25.23,33.66 R6.2
  Top 0.63: U$1.P$5 33.04,29.31
N$8  (via drill 0.35)
  Top 0.406: v39.42,69.54 39.31,69.43 | 27.24,69.43 v27.19,69.38
  Top 0.508: 39.31,69.43 27.24,69.43 | v27.37,55.32 27.54,55.16 29.07,55.16 29.45,55.53 IC4.31
  Bottom 0.406: R8.2
  Bottom 0.508: v27.19,69.38 27.05,69.24 27.05,55.55 27.14,55.55 v27.37,55.32 | R8.2 52.4,72.18 49.68,69.46 39.5,69.46 v39.42,69.54
N$9  (via drill 0.35)
  Top 0.406: v39.49,68.48 39.49,68.53 | v28.07,68.47 28.13,68.53
  Top 0.508: 39.49,68.53 28.13,68.53 | v28.03,56.17 28.2,56.34 IC4.30
  Bottom 0.406: v28.02,56.17 v28.03,56.17 | v39.49,68.48 39.53,68.52 | 54.85,75.11 R7.2
  Bottom 0.508: v28.07,68.47 28.02,68.47 v28.02,56.17 | 39.53,68.52 49.84,68.52 54.85,73.53 54.85,75.11
N$10
  Top 0.406: R9.1 55.69,68.44 57.84,70.59 MCU_OK.A
N$11
  Top 0.6: R10.1 C7.1
  Top 0.61: R10.1 29.59,45.39 30.27,45.39 30.74,44.92 30.74,41.05 30.5,40.81
  Top 0.63: U$1.P$22 30.5,40.81
N$12
  Top 0.406: R23.1 56.2,63.53 56.2,64.47 57.29,65.56 CAN_ERR.A
N$13  (via drill 0.35)
  Top 0.406: C22.2 50.8,77.46 R24.1 v48.11,78.66 v48.1,78.67 | IC7.18 38.95,73.34 41.58,73.34 42.3,74.06 43.65,74.06 v44.61,73.1
  Bottom 0.406: v48.1,78.67 48.1,76.59 v44.61,73.1
N$14
  Top 0.61: R12.2 36.63,27.2 38.13,28.7
  Top 0.63: U$1.P$9 38.13,28.7
N$15  (via drill 0.4 pad 0.6)
  Top 0.6: v35.58,28.45 v35.57,28.45 | v40.01,13.21 v40,13.2 R11.2
  Top 0.63: U$1.P$7 v35.58,28.45
  Bottom 0.61: v35.57,28.45 39.69,24.33 39.69,13.53 v40.01,13.21
N$16
  Top 0.61: R13.2 39.4,26.3 39.4,29.16
  Top 0.63: U$1.P$10 39.39,29.17 39.4,29.16
N$17
  Top 0.6: R13.1 C11.1
N$18
  Top 0.6: 40.68,28.87 40.68,27.39 C11.2
  Top 0.63: U$1.P$11 40.66,28.89 40.68,28.87
N$20
  Top 0.6: R16.2 34.31,41.25 34.31,40.98
  Top 0.63: U$1.P$19 34.31,40.98
N$23  (via drill 0.4 pad 0.6)
  Top 0.6: v31.08,61.27 31.08,60.67 31.41,60.34 IC4.25 | R30.1 22.02,39 R22.2 22.34,39.05 v23.57,39.05
  Bottom 0.61: v31.08,61.27 31.17,61.18 31.17,46.63 23.59,39.05 v23.57,39.05
N$24  (via drill 0.35)
  Top 0.406: v41.1,52 41.1,50.7 U$4.XTAL2
  Top 0.508: IC4.8 39.93,53.3 41.09,52.14 41.09,50.71 U$4.XTAL2
  Bottom 0.406: C25.1 41.1,51.06 v41.1,52
N$25  (via drill 0.35)
  Top 0.508: U$4.XTAL1 v37.74,48.77 37.49,49.02 37.49,51.67 38.03,52.21 IC4.7
  Bottom 0.406: C13.1 37.95,48.98 v37.74,48.77
N$32  (via drill 0.4 pad 0.6)
  Top 0.6: v44.68,13.03 44.55,13.03 42.96,11.44 R29.2 | IC4.9 40.94,54.07 v41.76,54.07 | v46.9,51.83 46.9,45.67 v46.93,45.64
  Bottom 0.6: v41.76,54.07 44.67,54.07 v46.9,51.84 v46.9,51.83
  Bottom 0.61: v46.93,45.64 46.99,45.58 46.99,40.69 41.97,35.67 41.97,15.74 v44.68,13.03
NRBND_EMU  (via drill 0.35)
  Top 0.508: v13.15,48.93 13.07,49.01 IC2.3
  Top 0.6: IC2.4 IC2.3
  Bottom 0.508: NRBND.1 17.6,25.41 17.6,44.48 v13.15,48.93
NRBND_GND  (via drill 0.35)
  Top 0.406: IC5.5 17.41,60.45
  Top 0.508: 14.8,47.84 14.8,47.85 14.43,48.22 14.43,49.32 13.29,50.46 13.29,53.21 C17.1 | 11.13,49.01 IC2.2 11.13,48.99 11.13,48.21 11.5,47.84 14.8,47.84 | 17.41,60.45 12.8,60.45 12.8,60.44 | 12.8,60.44 11.39,60.44 11.39,56.86 10.98,56.86 v10.94,56.82 10.94,56.85 C10.2 | 12.8,60.44 IC3.6 | IC3.2 13.75,55.08 13.25,54.58 13.25,53.6 C17.1 | v11.7,54.33 12.91,54.33 C17.1 | 14.8,47.84 17.46,47.84 C18.1 17.93,49.3 18.44,49.81 20.81,49.81 21.32,49.3 PS1.3 | PS1.3 21.32,43.57 19.09,41.34 19.09,22.71 11.54,15.16 11.49,15.16 NRBND.3 | C28.2 24.41,46.23 PS1.3
  Top 0.6: PS1.3 21.39,46.3
  Bottom 0.508: v10.94,56.82 11.7,56.06 v11.7,54.33
NRBND_HEAT
  Bottom 2: NRBND.2 6.59,21.74 12.13,27.28 12.13,32.66 12.42,32.95 HEAT_RES.1
POWER_ON  (via drill 0.35)
  Top 0.406: MCU_OK.C 53.49,69.19 53.49,65.16 53.2,64.87 v42.23,64.87 | v39.6,64.65 38.93,63.98 36.05,63.98 34.82,62.75 IC4.22
  Bottom 0.406: v42.23,64.87 39.82,64.87 v39.6,64.65
RESET  (via drill 0.4 pad 0.6)
  Top 0.508: v33.09,57.11 33.06,57.14 IC4.29 26.51,57.15 25.73,56.37 R18.2
  Top 0.6: U$1.P$8 36.85,32.1 v31.44,37.51 v31.43,37.51
  Top 0.63: U$1.P$8 36.85,29.26
  Bottom 0.508: v33.09,57.11 33.09,59.48 RESET.2
  Bottom 0.61: v33.09,57.11 32.23,56.25 32.23,45.31 31.43,44.51 v31.43,37.51
RXCAN
  Top 0.406: IC7.28 37.08,79.86 37.08,75.31 IC7.21
RXD
  Bottom 0.406: TXD.1 R8.1
SCL
  Top 0.406: R2.2 17.86,62.54 18.07,62.34
  Top 0.508: IC4.28 25.84,57.94 24.75,59.02 IC5.3 21.38,59.02 18.07,62.34
SCL_ISO
  Top 0.406: 13.73,58.55 IC3.5 13.75,59.56 13.95,59.76 15.47,59.76 16.2,59.02 IC5.6 18.43,59.02 20.91,56.54 20.91,54.45 R3.2
SDA  (via drill 0.35)
  Top 0.406: R1.2 20.63,62.55 | 20.63,61.32 v20.61,61.3 | 22.95,57.8 IC5.2
  Top 0.508: IC4.27 28.15,58.73 24.33,62.55 20.63,62.55 20.63,61.32 | 22.95,57.8 21.64,57.8 v21.51,57.93
  Bottom 0.406: 21.29,57.93 v21.51,57.93
  Bottom 0.508: v20.61,61.3 20.61,58.61 21.29,57.93
SDA_ISO
  Top 0.406: IC5.7 18.57,57.76 18.79,57.54 R4.2
  Top 0.508: IC3.4 14.7,58 14.95,57.76 IC5.7
SPI_CLK  (via drill 0.4 pad 0.6)
  Top 0.406: IC7.14 31.84,71.4 34.4,71.4 35.43,70.37 39.89,70.37 40.58,69.69 40.58,61.78
  Top 0.6: 46,58.07 46,44.63 v45.91,44.54 | 40.58,61.78 40.4,61.78 IC4.17
  Top 0.61: 46,58.07 42.29,61.78 40.4,61.78
  Top 0.63: v43.01,40.83 41.99,40.83 41.93,40.77 U$1.P$13
  Bottom 0.406: v45.91,44.54 45.91,46.23 46.41,46.73 52.13,46.73 53.48,45.38 53.48,43.1 55.94,40.64 58.8,40.64 60.3,42.14 60.3,45.04 58.86,46.48 SV1.3
  Bottom 0.6: v45.91,44.54 45.91,43.58 43.16,40.83 v43.01,40.83
SPI_CS1  (via drill 0.4 pad 0.6)
  Top 0.6: IC4.14 41.4,58.74 42.73,57.41 42.73,44.76 v42.67,44.76
  Top 0.63: U$1.P$16 v38.12,41.49
  Bottom 0.6: v38.12,41.49 v38.12,41.5 40.58,43.96 41.81,43.96 42.61,44.76 v42.67,44.76
SPI_CS2  (via drill 0.4 pad 0.6)
  Top 0.406: IC7.17 37.43,72.72 36.01,71.3 v36.01,71.2
  Top 0.6: IC4.13 v38.63,57.94
  Bottom 0.508: v36.01,71.2 36.01,70.91 37.16,69.76 37.16,59.42 38.63,57.95 v38.63,57.94
SPI_MISO  (via drill 0.35, 0.4 pad 0.6)
  Top 0.406: v41.5,62.78 41.39,62.89 41.39,63.01 41.35,63.01 41.35,70.62 39.9,72.07 IC7.16
  Top 0.6: v44.83,45.04 44.7,45.17 44.7,57.97 42.25,60.42 v42.14,60.42 42.14,60.38 40.31,60.38 IC4.16
  Top 0.63: v41.38,41.86 40.66,41.14 U$1.P$14
  Bottom 0.406: v41.5,62.78 42.14,62.14 v42.14,60.42 | v44.83,45.04 44.83,46.47 45.9,47.54 52.38,47.54 54.43,45.49 54.43,43.42 56.37,41.48 58.38,41.48 58.99,42.09 58.99,43.76 SV1.1
  Bottom 0.6: v44.83,45.04 44.83,43.86 42.83,41.86 v41.38,41.86
SPI_MOSI  (via drill 0.35, 0.4 pad 0.6)
  Top 0.406: IC7.15 37.44,71.41 v37.24,71.21
  Top 0.6: v43.73,44.14 v43.72,44.15 43.72,57.64 41.82,59.54 IC4.15 39.03,59.54 v38.83,59.74
  Top 0.63: v39.45,41.5 39.39,41.44 U$1.P$15
  Bottom 0.406: SV1.4 54.84,46.48 53.05,48.27 45.61,48.27 43.73,46.39 v43.73,44.14
  Bottom 0.508: v38.83,59.74 38.13,60.44 38.13,70.52 37.44,71.21 v37.24,71.21
  Bottom 0.6: v43.73,44.14 42.54,42.95 40.88,42.95 39.45,41.52 v39.45,41.5
TXCAN
  Top 0.406: IC7.24 38.93,77.24 40.38,77.24 40.38,74.67 IC7.20
TXD
  Bottom 0.406: RXD.1 54.93,77.15 R7.1
UA  (via drill 0.4 pad 0.6)
  Top 0.6: C15.1 34.56,65.42 R19.1
  Top 0.61: R19.1 34.02,64.88 IC4.23 34.03,56.14 v34.13,56.04 | 31.77,40.89 31.77,43.43 v34.35,46.01
  Top 0.63: U$1.P$21 31.77,40.89
  Bottom 0.61: v34.35,46.01 34.32,46.04 34.32,55.85 v34.13,56.04
UR  (via drill 0.4 pad 0.6)
  Top 0.6: R20.1 C24.1 29.08,65.39 29.08,59.81 v29.06,59.79 | v37.03,37.46 37.03,36.3 41.93,31.4 U$1.P$12 | v33.23,48.3 28.98,52.55 v28.98,52.71
  Top 0.61: R20.1 32.5,64.92 32.5,63.24 33.23,62.51 IC4.24
  Top 0.63: U$1.P$12 41.93,29.33
  Bottom 0.6: v29.06,59.79 29.07,59.78 29.07,52.62 v28.98,52.71
  Bottom 0.61: v33.23,48.3 33.23,44.64 37.03,40.84 v37.03,37.46
USUP  (via drill 0.4 pad 0.6)
  Top 0.6: R14.1 29.89,24.29 29.42,24.23 R15.2
  Top 0.61: R16.1 34.46,44.14 33.04,42.72 33.04,40.97 | U$1.P$20 v33.04,37.94 | R14.1 33.15,24.05 34.23,25.12 34.23,27.6 33.92,27.91 v33.04,27.91
  Top 0.63: U$1.P$20 33.04,40.97
  Bottom 0.61: v33.04,37.94 v33.04,27.91

## Text on the board
tPlace: 1.GND | 2.CANL | 3.CANH | 4.+5V | 1 | RES1 | RES2 | HEAT | EMU | 12V | GND | VGND | 12V | NRNST | IP | HEAT | IPREF
tNames: GND | 5V | XTAL2 | XTAL1 | OpenTG AFR Mainboard / By Kostas Anes | + -